# EAGLE board PyroelectricSensor (EAGLE 6.3)
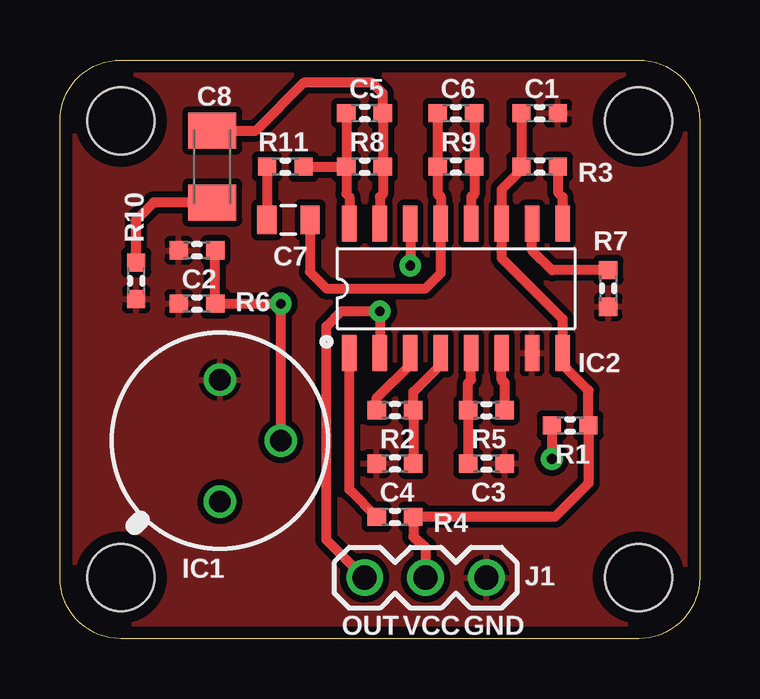
[diagram p0: board, top side]
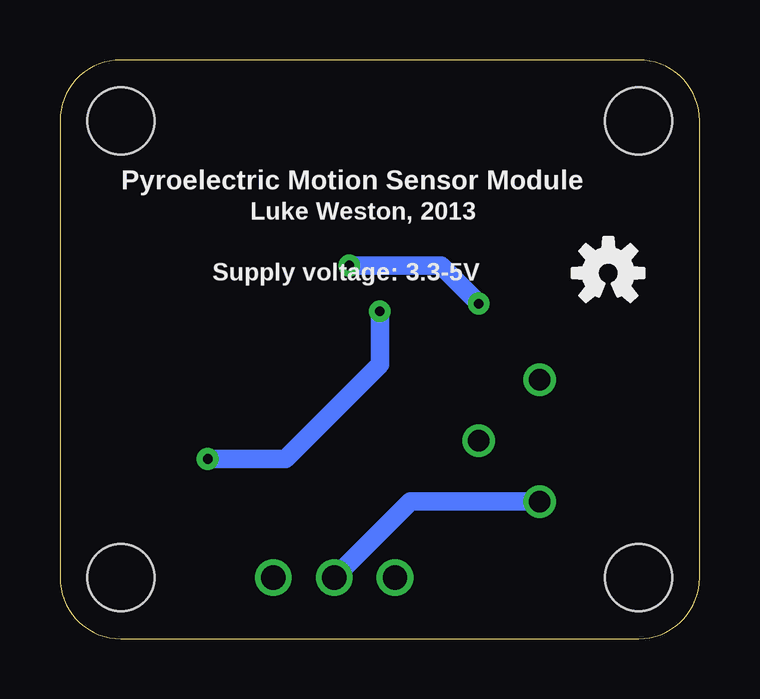
[diagram p1: board, bottom side, seen from below]

Size 26.67 x 24.13 mm. Coordinates in mm from the lower left corner, seen from the top.
Outline: 0,2.54 0,21.59 arc-90 2.54,24.13 24.13,24.13 arc-90 26.67,21.59 26.67,2.54 arc-90 24.13,0 2.54,0 arc-90 0,2.54
Copper layers (1*16): Top 0.035mm / dielectric 1.5mm / Bottom 0.035mm
Design rules "PCBCart-Standard *": minimum track width 8mil, minimum drill 0.4mm, track to track 8mil, track to pad 8mil, pad to pad 8mil, via to via 8mil, smd to smd 8mil, copper to edge 20mil, drill to drill 8mil, minimum pad ring 8mil, minimum via ring 10mil, stop-mask expansion 3mil, vias tented up to drill 16mil, thermal gap 8mil
Holes 2.8 mm at 24.13,2.54 2.54,21.59 2.54,2.54 24.13,21.59

## Footprints (pad centres in the part's own frame; a part is rotated, then mirrored left to right if it is on the bottom)
0603 = smd 0.762 x 0.762: 1 -0.762,0; 2 0.762,0
0805 = smd 0.8 x 1.2: 1 -0.9,0; 2 0.9,0
C1206K = smd 1.5 x 2: 1 -1.5,0; 2 1.5,0
TO5-CAN = drill 0.9: 1 2.54,0; 2 0,2.54; 3 -2.54,0
16-SOIC = smd 0.6 x 1.5: 1 -4.445,-2.7; 2 -3.175,-2.7; 3 -1.905,-2.7; 4 -0.635,-2.7; 5 0.635,-2.7; 6 1.905,-2.7; 7 3.175,-2.7; 8 4.445,-2.7; 9 4.445,2.7; 10 3.175,2.7; 11 1.905,2.7; 12 0.635,2.7; 13 -0.635,2.7; 14 -1.905,2.7; 15 -3.175,2.7; 16 -4.445,2.7
1X03 = drill 1.016: 1 0,0; 2 2.54,0; 3 5.08,0

## Placement (x,y rotation side)
C1  100nF  [0603]  20,21.91 0 top
C2  10nF  [0603]  5.71,16.19 180 top
C3  10nF  [0603]  17.78,7.3 0 top
C4  10nF  [0603]  13.97,7.3 180 top
C5  10nF  [0603]  12.7,21.91 180 top
C6  10nF  [0603]  16.51,21.91 0 top
C7  10µF  [0805]  9.53,17.46 0 top
C8  47µF  [C1206K]  6.35,19.68 90 top
IC1  RE200B  [TO5-CAN]  6.67,8.26 270 top
IC2  BIS0001  [16-SOIC]  16.51,14.61 0 top
J1  [1X03]  12.7,2.54 0 top
R1  10kΩ  [0603]  21.27,8.89 0 top
R2  10kΩ  [0603]  13.97,9.53 180 top
R3  10kΩ  [0603]  20,19.68 180 top
R4  10kΩ  [0603]  13.97,5.08 0 top
R5  15kΩ  [0603]  17.78,9.53 0 top
R6  47kΩ  [0603]  5.71,13.97 0 top
R7  1MΩ  [0603]  22.86,14.61 90 top
R8  2MΩ  [0603]  12.7,19.68 0 top
R9  1MΩ  [0603]  16.51,19.68 180 top
R10  47kΩ  [0603]  3.17,14.92 270 top
R11  10kΩ  [0603]  9.4,19.68 0 top
SY  OSHW-LOGOS  [OSHW-LOGO-S]  3.81,15.24 0 bottom

## Library data of the parts
C1-C6 R1-R11 = freetronics-master-v1; PACKAGE: 0603
C7 = freetronics-master-v1; PACKAGE: 0805
C8 = rcl; PACKAGE: 1206
IC1 = freetronics-luke; PACKAGE: TO-5
IC2 = freetronics-luke; PACKAGE: 16-SOIC
J1 = freetronics-master-v1
SY = SparkFun

## Nets
+3V3: C1.1 IC1.1 IC2.8 IC2.11 J1.2 R1.2 R3.2 R4.2
GND: C1.2 C2.2 C3.2 C4.2 IC1.3 IC2.7 J1.3 R6.1 R7.1 R10.2
N$1: IC2.6 R5.2
N$2: IC2.10 R7.2
N$3: C5.1 C8.2 IC2.15 R8.2
N$4: IC2.2 J1.1 R1.1
N$5: IC2.1 R4.1
N$6: IC2.3 R2.2
N$7: C4.1 IC2.4 R2.1
N$8: C3.1 IC2.5 R5.1
N$9: IC2.9 R3.1
N$10: C2.1 IC1.2 IC2.14 R6.2
N$11: C6.1 C7.2 IC2.13 R9.2
N$12: C6.2 IC2.12 R9.1
N$13: C5.2 IC2.16 R8.1 R11.2
N$14: C7.1 R11.1
N$15: C8.1 R10.1

## Tracks (layer width: path | path; a pad name or v marks a point on that pad's centre or on a via)
+3V3
  Top 0.254: IC2.8 20.95,11.43
  Top 0.406: J1.2 15.24,3.81 14.73,4.25 R4.2 20.64,5.08 22.04,6.48 R1.2 22.04,10.35 20.95,11.43 | IC2.8 20.95,13.34 18.41,15.88 IC2.11 18.41,18.73 19.24,19.56 R3.2 C1.1
  Bottom 0.762: IC1.1 12.06,5.71 J1.2
GND
  pour Top (isolate 0.254): -1.27,25.4 27.94,25.4 27.94,-1.27 -1.27,-1.27
N$1
  Top 0.406: R5.2 18.54,10.67 18.41,10.79 IC2.6
N$2
  Top 0.406: R7.2 20.51,15.37 19.68,16.19 IC2.10
N$3
  Top 0.406: IC2.15 13.34,18.41 13.46,18.54 R8.2 C5.1 13.46,22.73 13.02,23.18 10.16,23.18 8.17,21.18 C8.2
N$4  (via drill 0.4)
  Top 0.406: J1.1 11.11,4.13 11.11,13.02 11.75,13.65 v13.34,13.65 IC2.2 | R1.1 v20.51,7.49
  Bottom 0.762: v20.51,7.49 17.27,7.49 13.34,11.43 v13.34,13.65
N$5
  Top 0.406: IC2.1 12.06,6.22 R4.1
N$6
  Top 0.254: 14.61,11.43 IC2.3
  Top 0.406: R2.2 13.21,10.03 14.61,11.43
N$7
  Top 0.254: 15.88,11.43 IC2.4
  Top 0.406: 15.88,11.43 14.73,10.29 R2.1 C4.1
N$8
  Top 0.406: IC2.5 17.14,10.79 17.02,10.67 R5.1 C3.1
N$9
  Top 0.406: R3.1 20.77,18.61 20.95,18.41 IC2.9
N$10  (via drill 0.4)
  Top 0.406: IC2.14 v14.61,15.56 | IC1.2 v9.21,13.97 R6.2 C2.1
  Bottom 0.762: v14.61,15.56 10.79,15.56 v9.21,13.97
N$11
  Top 0.406: C6.1 R9.2 15.75,18.54 15.88,18.41 IC2.13 15.88,15.24 15.24,14.61 11.11,14.61 10.43,15.29 C7.2
N$12
  Top 0.406: IC2.12 17.14,18.41 17.27,18.54 R9.1 C6.2
N$13
  Top 0.406: R8.1 11.94,18.54 12.06,18.41 IC2.16 | C5.2 R8.1 | R11.2 R8.1
N$14
  Top 0.254: 8.64,17.47 C7.1
  Top 0.406: R11.1 8.64,17.47
N$15
  Top 0.406: R10.1 3.17,17.46 3.9,18.18 C8.1

## Text on the board
tPlace: OUT | VCC | GND
bPlace: Pyroelectric Motion Sensor Module | Luke Weston, 2013 | Supply voltage: 3.3-5V